# EAGLE board KeepUntil-revb (EAGLE 7.5.0)
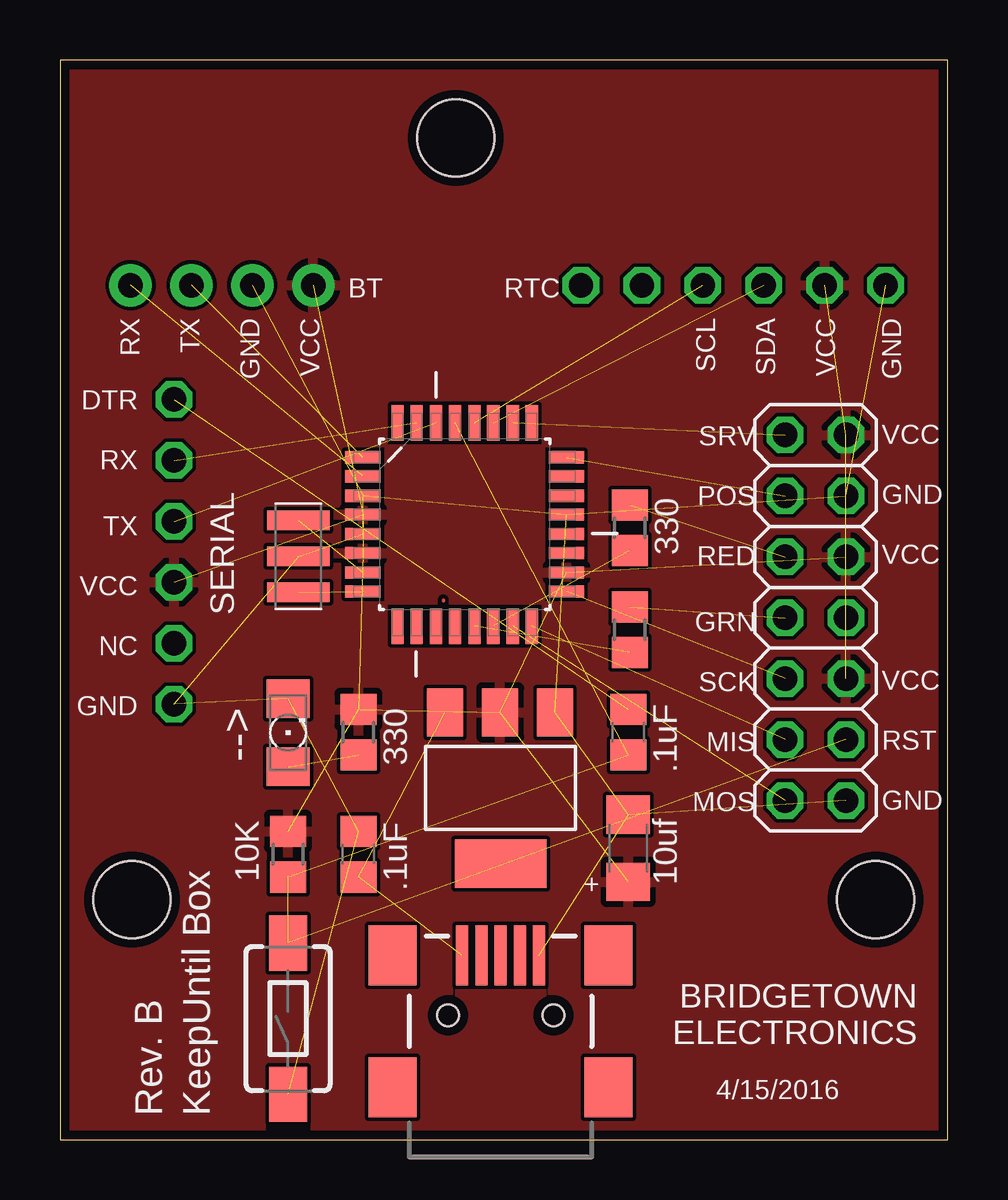
[diagram p0: board, top side]
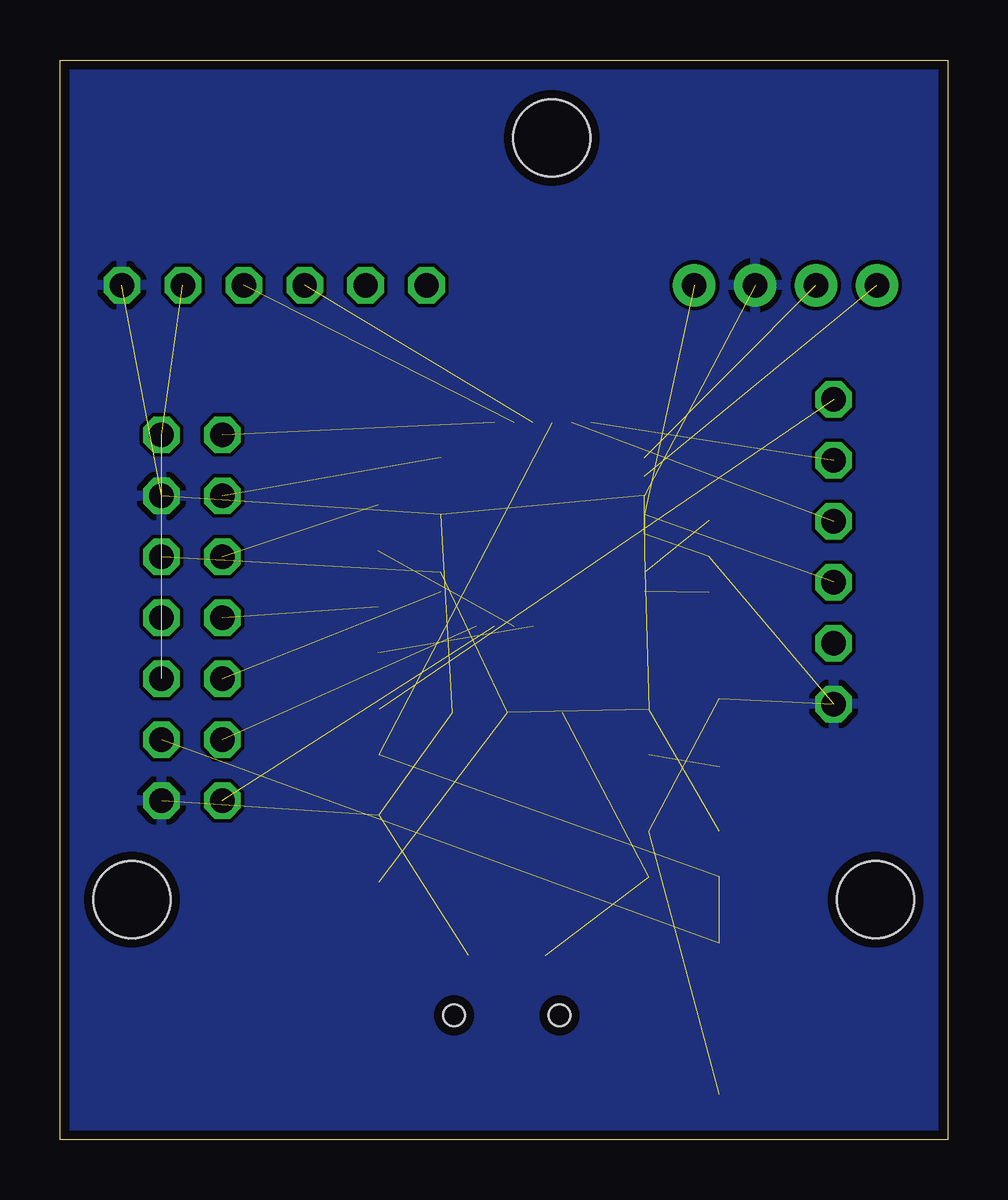
[diagram p1: board, bottom side, seen from below]

Size 37 x 45 mm. Coordinates in mm from the lower left corner, seen from the top.
Outline: 0,0 37,0 37,45 0,45 0,0
Copper layers (1*16): Top 0.0356mm / dielectric 1.5011mm / Bottom 0.0356mm
Design rules "oshpark-2layer": minimum track width 6mil, minimum drill 13mil, track to track 6mil, track to pad 6mil, pad to pad 6mil, via to via 6mil, smd to smd 6mil, copper to edge 15mil, drill to drill 6mil, minimum pad ring 7mil, minimum via ring 7mil, stop-mask expansion 2.5mil, vias tented up to drill 0mil, thermal gap 10mil
Holes 3.2 mm at 3,10 16.5,41.75 34,10

## Footprints (pad centres in the part's own frame; a part is rotated, then mirrored left to right if it is on the bottom)
1X04-CLEANBIG = drill 1.016 pad 1.778: 1 -3.81,0; 2 -1.27,0; 3 1.27,0; 4 3.81,0
C0805 = smd 1.3 x 1.5: 1 -0.95,0; 2 0.95,0
C1206 = smd 1.6 x 1.8: 1 -1.4,0; 2 1.4,0
2X07 = drill 1.016 octagon: 1 -7.62,-1.27; 2 -7.62,1.27; 3 -5.08,-1.27; 4 -5.08,1.27; 5 -2.54,-1.27; 6 -2.54,1.27; 7 0,-1.27; 8 0,1.27; 9 2.54,-1.27; 10 2.54,1.27; 11 5.08,-1.27; 12 5.08,1.27; 13 7.62,-1.27; 14 7.62,1.27
SOT223 = smd 1.499 x 2.007: 1 -2.261,-3.15; 2 0.025,-3.15; 3 2.311,-3.15 | smd 3.81 x 2.007: 4 0,3.15
USB-MINIB = smd 2.5 x 0.5: D+ 2.5,0; D- 2.5,0.8; GND 2.5,-1.6; ID 2.5,-0.8; VBUS 2.5,1.6 | smd 2.5 x 2: MTN1 -3,4.5; MTN2 2.5,4.5; MTN3 -3,-4.5; MTN4 2.5,-4.5 | hole 0.9: 0,2.2; 0,-2.2
1206 = smd 1.6 x 1.803: A -1.422,0; C 1.422,0
CSTCR6M = smd 0.8 x 2.6: 1 -1.5,0; 2 0,0; 3 1.5,0
R0805 = smd 1.3 x 1.5: 1 -0.95,0; 2 0.95,0
1X06-CLEAN = drill 1.016 octagon: 1 -6.35,0; 2 -3.81,0; 3 -1.27,0; 4 1.27,0; 5 3.81,0; 6 6.35,0
TACTILE-SWITCH-1101NE = smd 2.3 x 1.6: 1 -3.15,0; 2 3.15,0
QFP80P900X900X120-32N = smd 1.473 x 0.508: 1 -4.242,2.794; 2 -4.242,2.007; 3 -4.242,1.194; 4 -4.242,0.406; 5 -4.242,-0.406; 6 -4.242,-1.194; 7 -4.242,-2.007; 8 -4.242,-2.794; 17 4.242,-2.794; 18 4.242,-2.007; 19 4.242,-1.194; 20 4.242,-0.406; 21 4.242,0.406; 22 4.242,1.194; 23 4.242,2.007; 24 4.242,2.794 | smd 0.508 x 1.473: 9 -2.794,-4.242; 10 -2.007,-4.242; 11 -1.194,-4.242; 12 -0.406,-4.242; 13 0.406,-4.242; 14 1.194,-4.242; 15 2.007,-4.242; 16 2.794,-4.242; 25 2.794,4.242; 26 2.007,4.242; 27 1.194,4.242; 28 0.406,4.242; 29 -0.406,4.242; 30 -1.194,4.242; 31 -2.007,4.242; 32 -2.794,4.242

## Placement (x,y rotation side)
BLUETOOTH  1X4-CLEANBIG  [1X04-CLEANBIG]  6.75,35.61 180 top
C1  .1uF  [C0805]  23.69,16.98 90 top
C2  10uf  [C1206]  23.69,12.14 90 top
C4  .1uF  [C0805]  12.44,11.89 90 top
CONTROL  [2X07]  31.5,21.75 270 top
IC2  REG1117  [SOT223]  18.37,14.65 180 top
J2  USBSMD  [USB-MINIB]  18.37,5.18 90 top
LED1  [1206]  9.51,16.96 90 top
Q1  CSTCR6M00G53Z  [CSTCR6M]  9.94,24.31 270 top
R1  10K  [R0805]  9.51,11.89 90 top
R3  330  [R0805]  23.75,25.5 90 top
R4  330  [R0805]  23.75,21.25 90 top
R7  330  [R0805]  12.44,16.98 90 top
RTC  [1X06-CLEAN]  28.07,35.61 180 top
S1  SWITCH-MOMENTARY-2SMD-1101NE  [TACTILE-SWITCH-1101NE]  9.51,5.04 90 top
SERIAL  [1X06-CLEAN]  4.75,24.5 90 top
U1  ATMEGA328P-AU  [QFP80P900X900X120-32N]  16.87,25.64 0 top

## Library data of the parts
BLUETOOTH RTC SERIAL = adafruit
C1 C2 C4 R1 R3 R4 R7 = resistor
CONTROL = pinhead
IC2 = burr-brown; MPN: LM1117 3v3; OC_FARNELL: 1097566; OC_NEWARK: 14P6981
J2 = SparkFun-Connectors; PROD_ID: CONN-08193
LED1 = led
Q1 = murata-filter; MPN: CSTCR6M00G53-R0; OC_FARNELL: 1170434; OC_NEWARK: 25M8759
S1 = SparkFun-Electromechanical; PROD_ID: SWCH-00815
U1 = Ava; DESCRIPTION: 8-bit Microcontroller with In-System Programmable Flash; MPN: ATMEGA328P-AU; OC_FARNELL: 1715486; OC_NEWARK: 14R4631; PACKAGE: TQFP-32; SUPPLIER: Atmel

## Nets
BT-RX: BLUETOOTH.3 U1.1
BT-TX: BLUETOOTH.4 U1.2
GND: BLUETOOTH.2 C2.2 C4.2 CONTROL.4 CONTROL.14 IC2.1 J2.GND LED1.C Q1.2 RTC.1 S1.1 SERIAL.1 U1.3 U1.5 U1.21
LED_GRN: CONTROL.7 R4.2
LED_RED: CONTROL.5 R3.2
MISO: CONTROL.11 U1.16
MOSI: CONTROL.13 U1.15
N$1: Q1.1 U1.7
N$2: Q1.3 U1.8
N$4: C4.1 IC2.3 J2.VBUS
N$7: LED1.A R7.1
N$8: R3.1 U1.14
N$9: R4.1 U1.13
N$17: C1.2 SERIAL.6
RESET: C1.1 CONTROL.12 R1.1 S1.2 U1.29
RTC-SCL: RTC.4 U1.28
RTC-SDA: RTC.3 U1.27
RX: SERIAL.4 U1.30
SCK: CONTROL.9 U1.17
SERVO: CONTROL.1 U1.26
SRV_FEEDBACK: CONTROL.3 U1.24
TX: SERIAL.5 U1.31
VCC: BLUETOOTH.1 C2.1 CONTROL.2 CONTROL.6 CONTROL.10 IC2.2 R1.2 R7.2 RTC.2 SERIAL.3 U1.4 U1.6 U1.18

## Tracks (layer width: path | path; a pad name or v marks a point on that pad's centre or on a via)
BT-RX  (1 unrouted)
BT-TX  (1 unrouted)
GND  (14 unrouted)
  pour Bottom: 0,0 37,0 37,45 0,45
LED_GRN  (1 unrouted)
LED_RED  (1 unrouted)
MISO  (1 unrouted)
MOSI  (1 unrouted)
N$1  (1 unrouted)
N$2  (1 unrouted)
N$4  (2 unrouted)
N$5
  Top 0.152: 15.98,22.46 15.98,22.49
N$7  (1 unrouted)
N$8  (1 unrouted)
N$9  (1 unrouted)
N$17  (1 unrouted)
RESET  (4 unrouted)
RTC-SCL  (1 unrouted)
RTC-SDA  (1 unrouted)
RX  (1 unrouted)
SCK  (1 unrouted)
SERVO  (1 unrouted)
SRV_FEEDBACK  (1 unrouted)
TX  (1 unrouted)
VCC  (12 unrouted)
  pour Top: 0,0 37,0 37,45 0,45

## Text on the board
tPlace: BT | RTC | RX | TX | GND | VCC | SCL | SDA | VCC | GND | DTR | SRV | RX | VCC | SERIAL | POS | TX | GND | RED | VCC | VCC | GRN | NC | SCK | VCC | GND | MIS | --> | RST | MOS | GND | + | BRIDGETOWN / ELECTRONICS | 4/15/2016 | Rev. B | KeepUntil Box